# Altium PCB hd-hdr.PcbDoc
Units mil, origin at the board's own origin, x right, y up, seen from the top; angles counter-clockwise.
Board outline 1400 x 650 mil, 6 copper layers (Top, 2-GND, 3-SIG, 4-SIG, 5-GND, Bottom), stack 46.142 mil thick; 63 components, 39 nets, 251 pads, 143 vias.
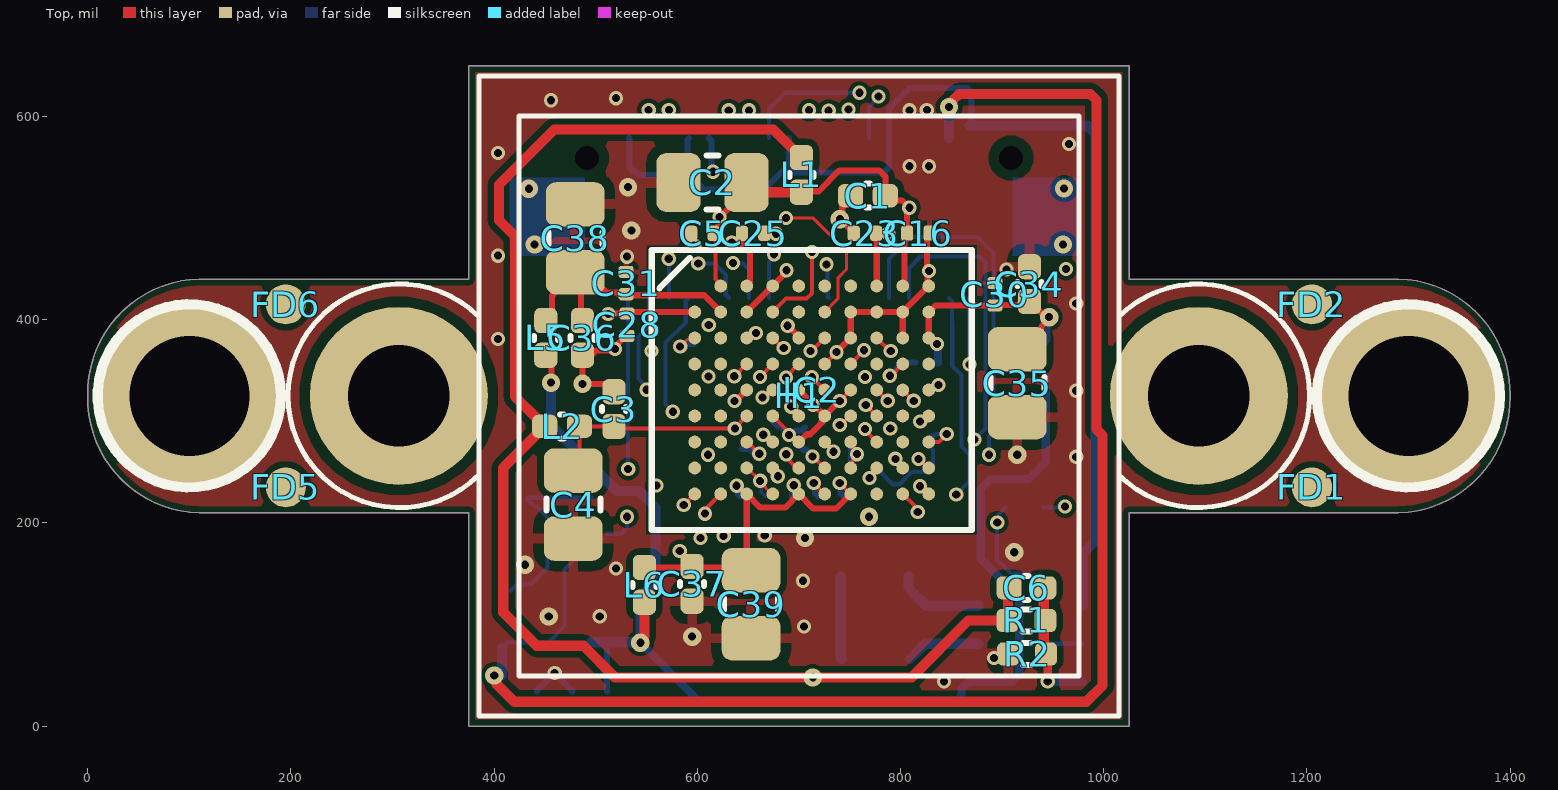
[diagram p0: Top view]
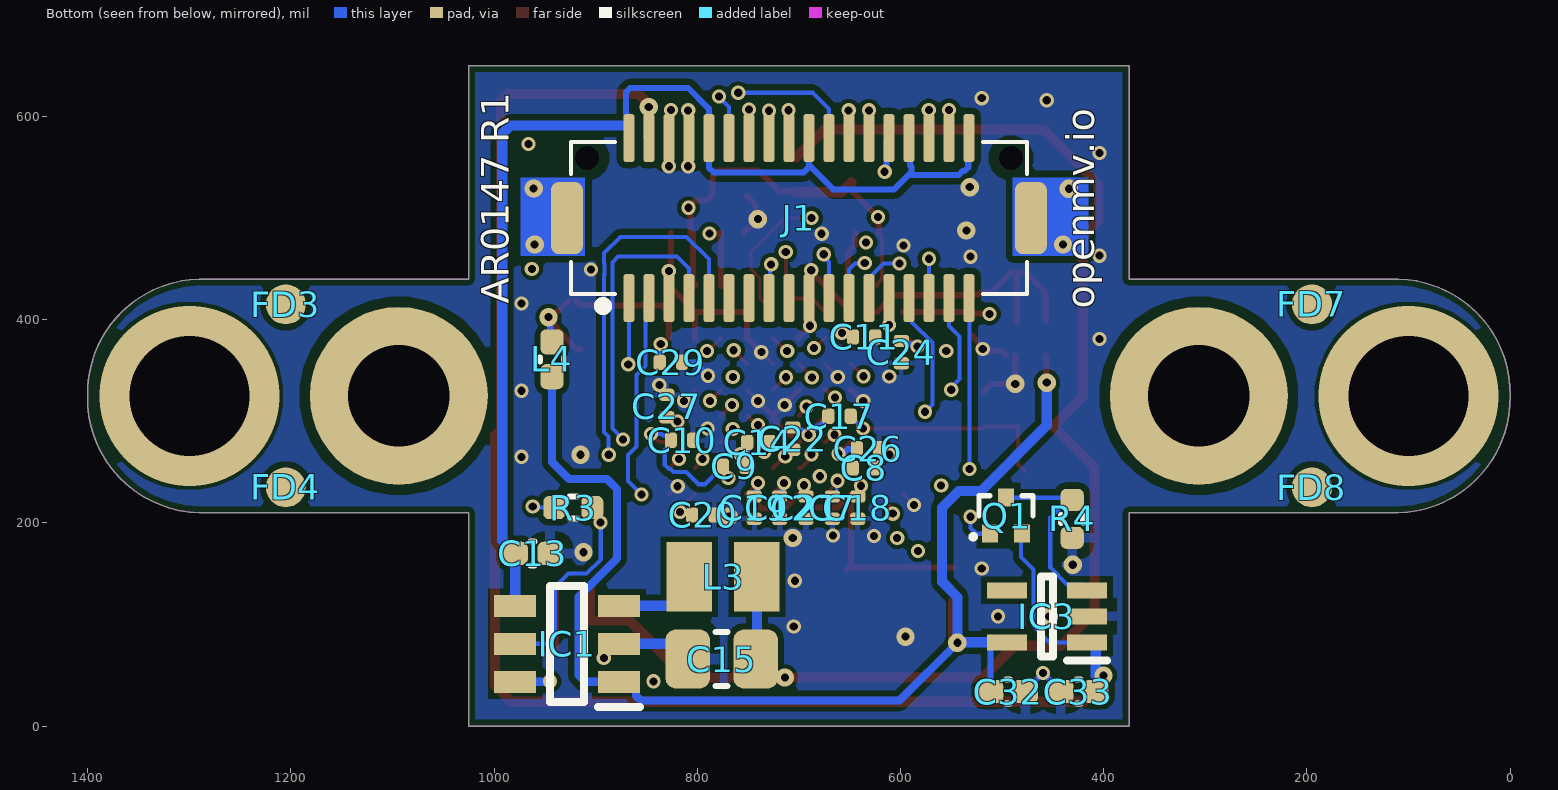
[diagram p1: Bottom view, seen from below]
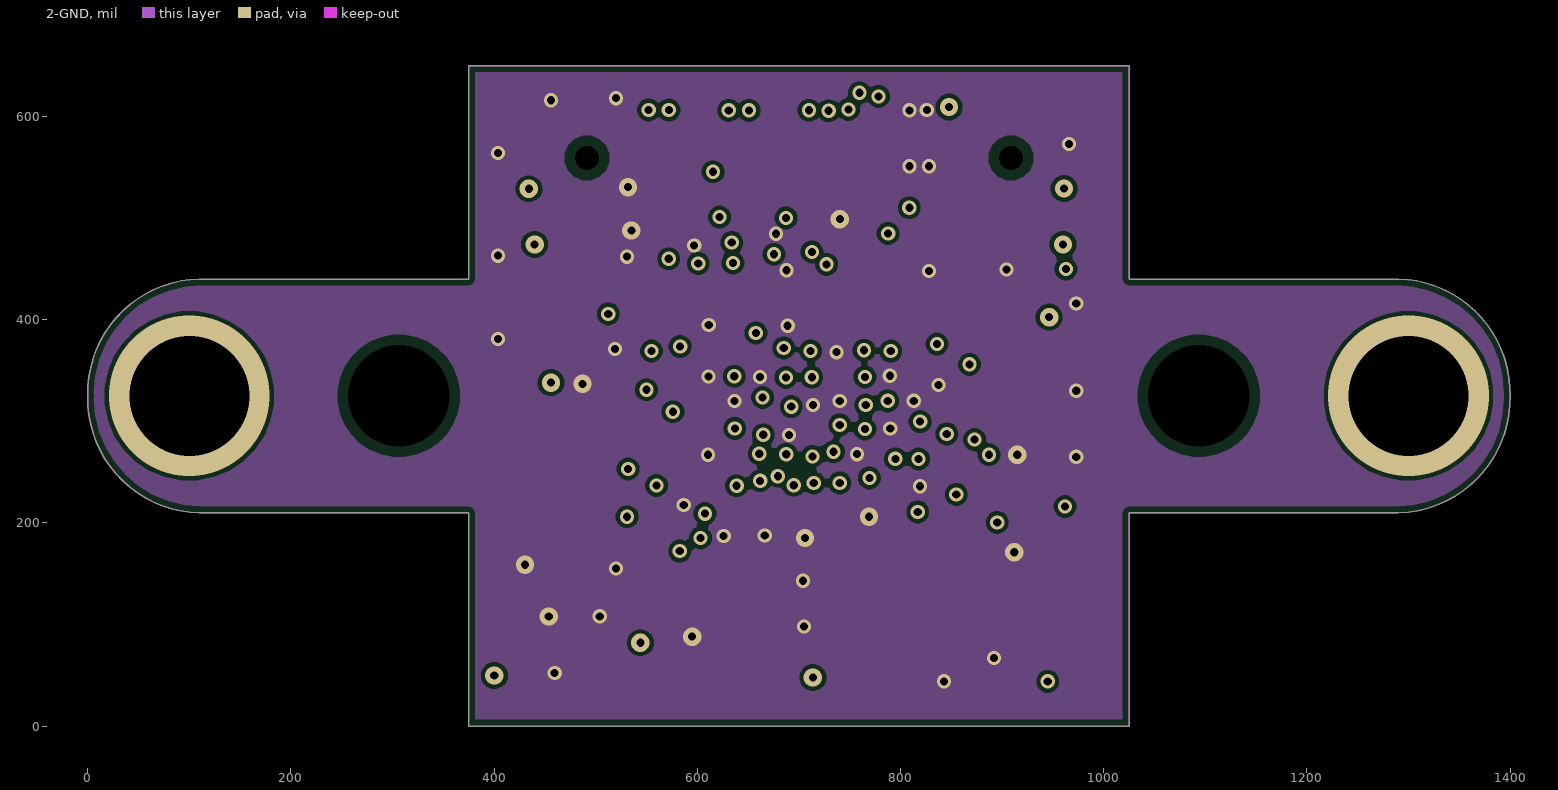
[diagram p2: 2-GND]
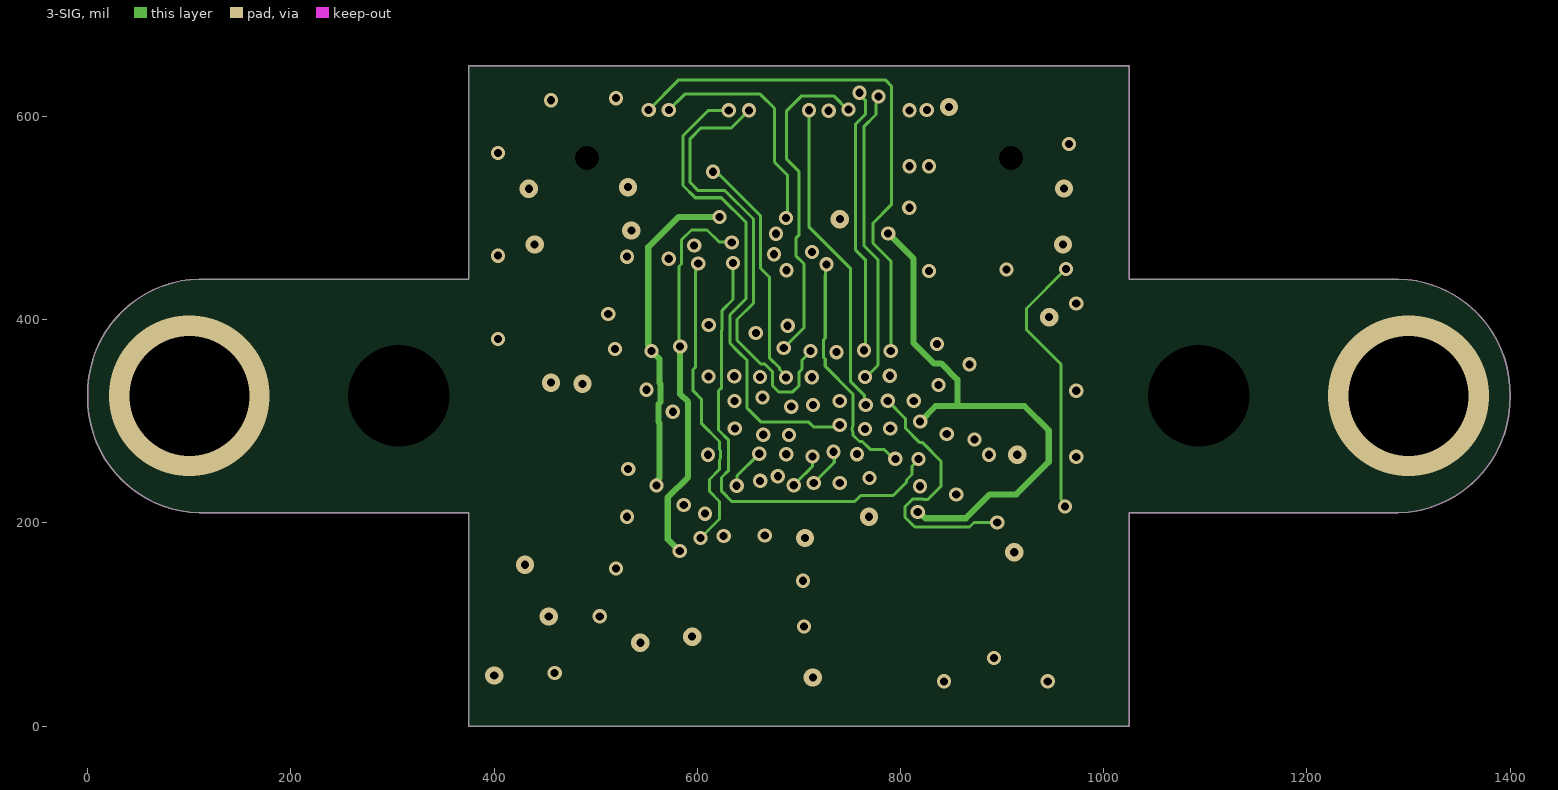
[diagram p3: 3-SIG]
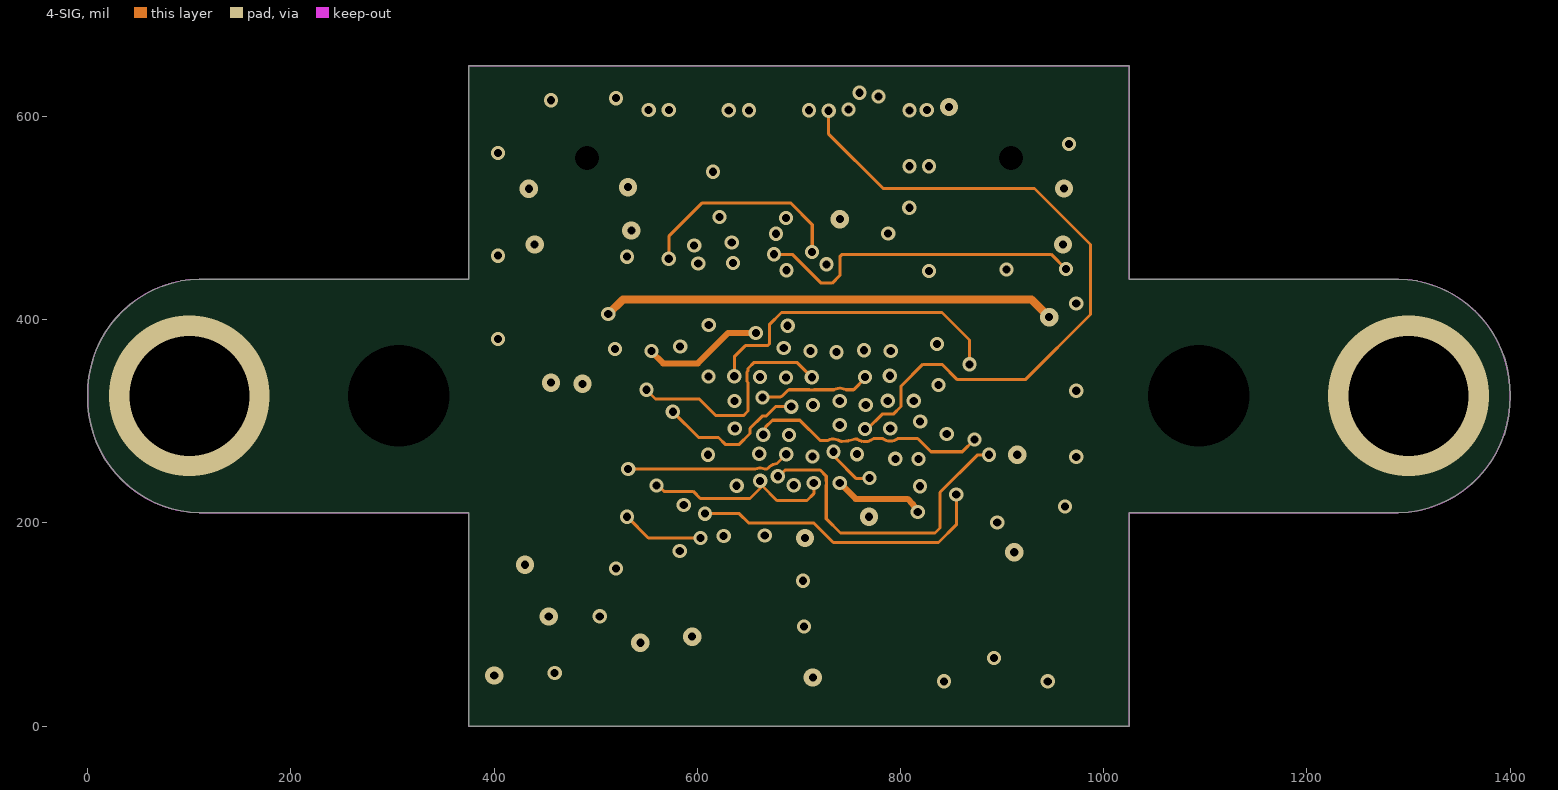
[diagram p4: 4-SIG]
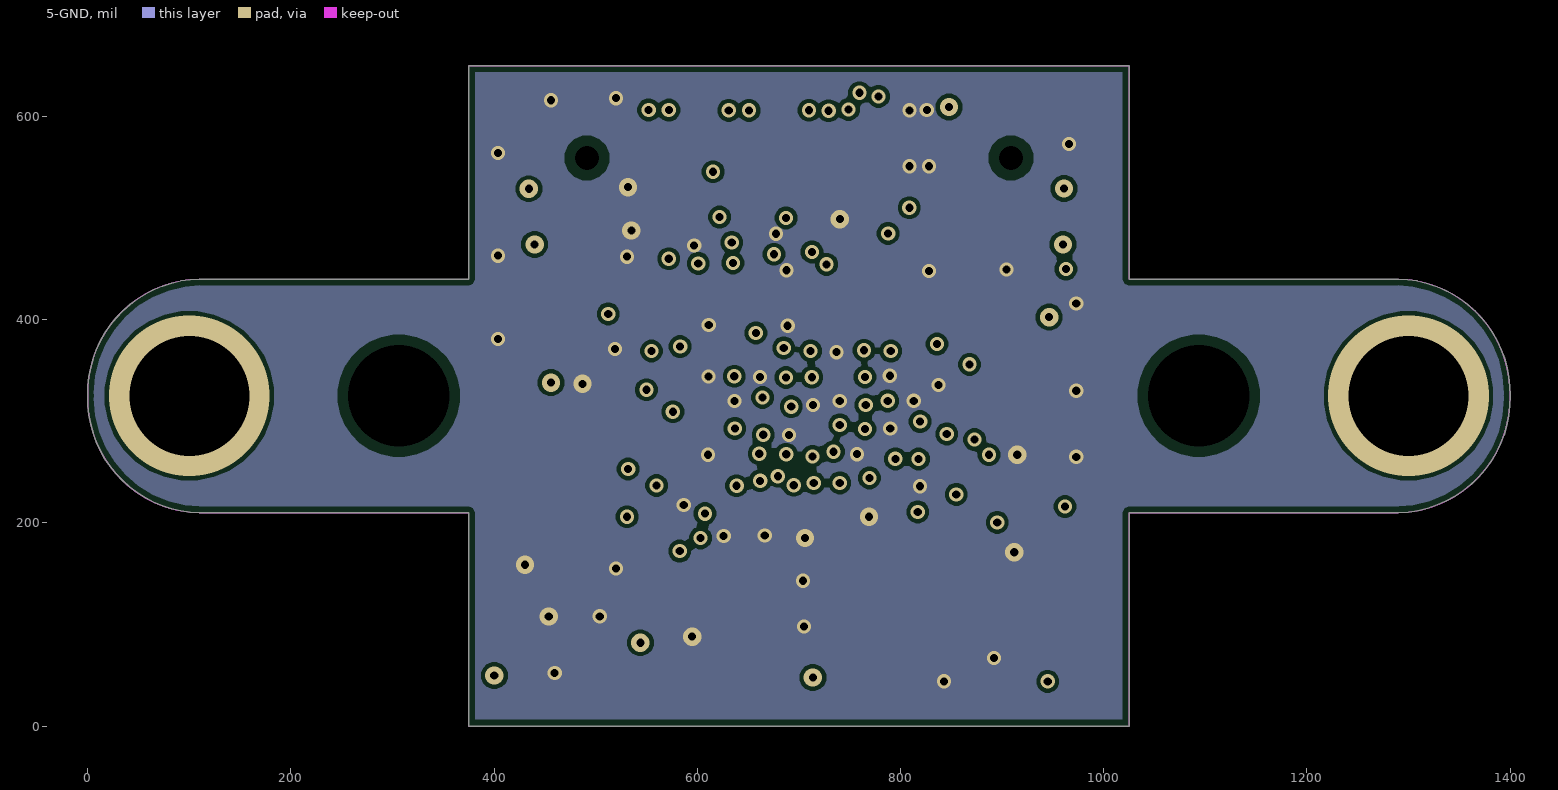
[diagram p5: 5-GND]
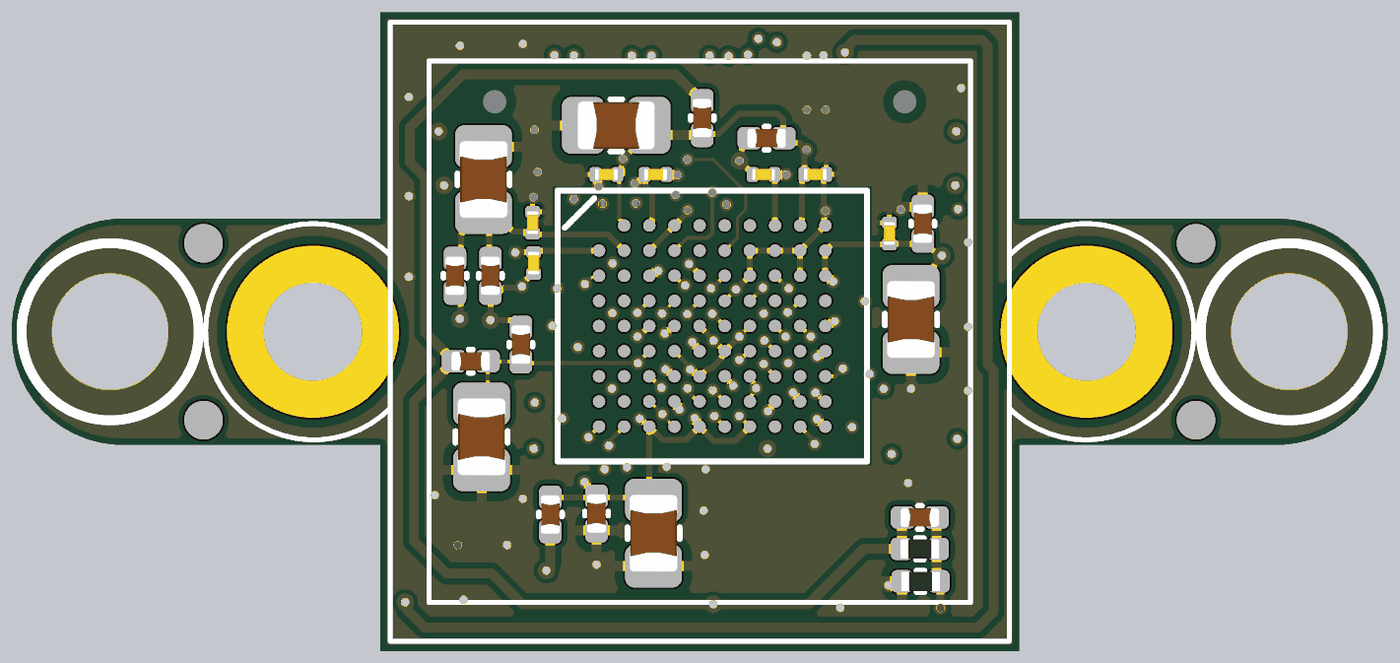
[diagram p6: 3D render of the assembled board from above, using the file's embedded part models]
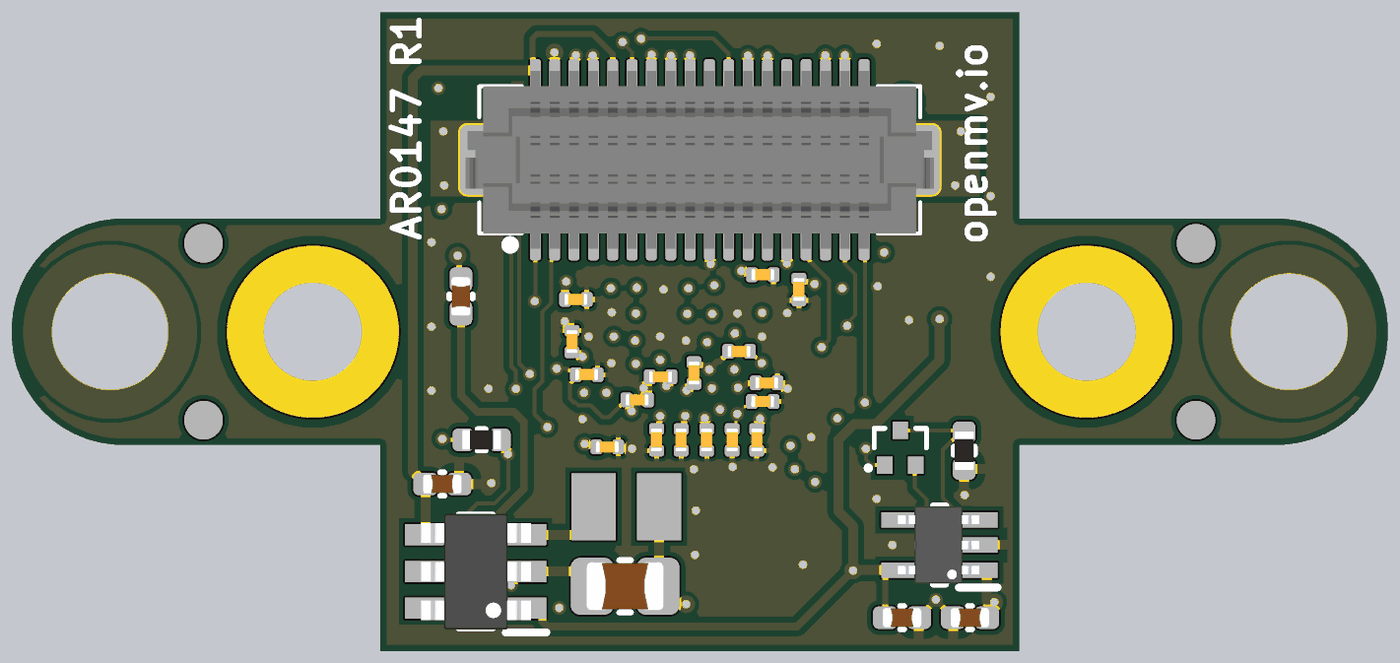
[diagram p7: 3D render of the assembled board from below, using the file's embedded part models]

## Layer stack, top to bottom
Top Solder: solder mask 0.4, Solder Resist, Dk 3.5
Top: signal copper 1.378
Dielectric 2: prepreg 5, PP-006, Dk 4.1
2-GND: signal copper 1.378
Dielectric 3: prepreg 10, PP-006, Dk 4.1
3-SIG: signal copper 1.378
Dielectric 1: dielectric 7.874, FR-4, Dk 4.8
4-SIG: signal copper 1.378
Dielectric 4: prepreg 10, PP-006, Dk 4.1
5-GND: signal copper 1.378
Dielectric 5: prepreg 5, PP-006, Dk 4.1
Bottom: signal copper 1.378
Bottom Solder: solder mask 0.4, Solder Resist, Dk 3.5

## Board outline
1290.03,210 1025.03,210 1025.03,0 375.03,0 375.03,210 110.03,210 cw(c112.53,322.5) 0.03,325 cw(c112.53,327.5) 110.03,440 375.03,440 375.03,650 1025.03,650 1025.03,440 1290.03,440 cw(c1287.53,327.5) 1400.03,325 cw(c1287.53,322.5)

## Design rules (kind name [scope] priority, off if disabled: settings)
BoardOutlineClearance mdCopperDimension [All] p1: gap=10 ignorepadtopadclearanceinfootprint=FALSE except(0: Arc-SplitContinuation Track-SplitContinuation SMDPad-SplitContinuation THPad-SplitContinuation Via-SplitContinuation Fill-SplitContinuation Poly-SplitContinuation Region-SplitContinuation Text-SplitContinuation; 3: Poly-OutlineEdge Poly-CavityEdge Poly-CutoutEdge Poly-SplitBarrior)
Clearance [All] p1: gap=4 ignorepadtopadclearanceinfootprint=FALSE except(6: Arc-Fill Arc-Poly Arc-Region Track-Fill Track-Poly Track-Region SMDPad-Fill SMDPad-Poly SMDPad-Region Fill-Fill Fill-Poly Fill-Region Poly-Poly Poly-Region Region-Region; 10: THPad-Fill THPad-Poly THPad-Region)
ComponentClearance ComponentClearance_1 [InComponent('H1')] p1: gap=0 collisioncheckmode=3 verticalgap=0 showdistances=FALSE
ComponentClearance [All] p2: gap=6 collisioncheckmode=3 verticalgap=10 showdistances=FALSE
HoleSize HoleSize_For_NetClass_signal [InNetClass('signal')] p1: absolutevalues=TRUE maxlimit=4 minlimit=4 maxpercent=80.000 minpercent=20.000
HoleSize HoleSize_For_NetClass_pwr [InNetClass('pwr')] p2: absolutevalues=TRUE maxlimit=4 minlimit=4 maxpercent=80.000 minpercent=20.000
HoleSize HoleSize_For_NetClass_gnd [InNetClass('gnd')] p3: absolutevalues=TRUE maxlimit=4 minlimit=4 maxpercent=80.000 minpercent=20.000
HoleSize [All] p4: absolutevalues=TRUE maxlimit=100000 minlimit=4 maxpercent=80.000 minpercent=20.000
HoleToHoleClearance mdDrill [All] p1: gap=3 allowstackedmicrovias=TRUE
MinimumSolderMaskSliver [All] p1 off: minsoldermaskwidth=10
PasteMaskExpansion Expansion_SMDPaste_OFF [InPadClass('SMDPaste_OFF')] p1: expansion=0
PasteMaskExpansion mlMinCreamFrame [All] p2: expansion=0
PolygonConnect PolygonConnect_1 [HasFootprint('C0201')] p1: thpad.connectstyle=Relief thpad.reliefconductorwidth=10 thpad.reliefentries=4 thpad.polygonreliefangle="90 Angle" thpad.airgapwidth=10 smdpad.connectstyle=Relief smdpad.reliefconductorwidth=5 smdpad.reliefentries=4 smdpad.polygonreliefangle="90 Angle" smdpad.airgapwidth=5 via.connectstyle=Relief via.reliefconductorwidth=10 via.reliefentries=4 via.polygonreliefangle="90 Angle" via.airgapwidth=10
PolygonConnect [All] p2: thpad.connectstyle=Relief thpad.reliefconductorwidth=10 thpad.reliefentries=4 thpad.polygonreliefangle="90 Angle" thpad.airgapwidth=10 smdpad.connectstyle=Relief smdpad.reliefconductorwidth=10 smdpad.reliefentries=4 smdpad.polygonreliefangle="90 Angle" smdpad.airgapwidth=10 via.connectstyle=Direct via.reliefconductorwidth=10 via.reliefentries=4 via.polygonreliefangle="90 Angle" via.airgapwidth=10
RoutingVias [All] p1: holewidth=8 width=14 viastyle="Through Hole" minholewidth=8 minwidth=14 maxholewidth=100 maxwidth=100
SolderMaskExpansion mlMinStopFrame [All] p1: expansion=2 istentingtop=FALSE
Width [All] p1: maxlimit=10 minlimit=3 preferedwidth=3
25 further rules are at their usual default settings.

## Classes and differential pairs
pad class SMDPaste_OFF: FD1-1 FD2-1 FD3-1 FD4-1 FD5-1 FD6-1 FD7-1 FD8-1 J1-1 J1-2 J1-3 J1-4 J1-5 J1-6 J1-7 J1-8 J1-9 J1-10 J1-11 J1-12 J1-13 J1-14 J1-15 J1-16 J1-17 J1-18 J1-19 J1-20 J1-21 J1-22 J1-23 J1-24 J1-25 J1-26 J1-27 J1-28 J1-29 J1-30 J1-31 J1-32 J1-33 J1-34 J1-35 J1-36

## Components (designator, comment, footprint, x,y, rotation, side; value= is the part's Value field where it differs from the comment)
C1 "4.7uF" 0402 768,522 r0 top
C2 "22uF" 0805 615.03,535 r0 top
C3 "4.7uF" 0402 518,312 r270 top
C4 "22uF" 0805 478,218 r90 top
C5 "0.22uF" C0201 605.03,485 r180 top
C6 "6.8pF" 0402 924,136 r0 top
C7 "0.22uF" C0201 667,215 r270 bottom
C8 "0.22uF" C0201 636,254 r180 bottom
C9 "0.22uF" C0201 763.69,255.73 r180 bottom
C10 "0.22uF" C0201 815.02,281.37 r180 bottom
C11 "0.22uF" C0201 635.85,383.03 r180 bottom
C12 "0.22uF" C0201 719,215 r270 bottom
C13 "4.7uF" 0402 962,170 r0 bottom
C14 "0.22uF" C0201 739.89,279.11 r0 bottom
C15 "22uF" 0805 776,66 r180 bottom
C16 "0.22uF" C0201 817.58,485.18 r0 top
C17 "0.22uF" C0201 660.03,305 r0 bottom
C18 "0.22uF" C0201 642,215 r270 bottom
C19 "0.22uF" C0201 744,215 r270 bottom
C20 "0.22uF" C0201 794.16,207.79 r180 bottom
C21 "0.22uF" C0201 693,215 r270 bottom
C22 "0.22uF" C0201 706,283 r90 bottom
C23 "0.22uF" C0201 765.03,485 r180 top
C24 "0.22uF" C0201 599.14,368.04 r270 bottom
C25 "0.22uF" C0201 655.03,485 r0 top
C26 "0.22uF" C0201 631.94,273.03 r180 bottom
C27 "0.22uF" C0201 830.03,315 r90 bottom
C28 "0.22uF" C0201 531,395 r270 top
C29 "0.22uF" C0201 826,358 r180 bottom
C30 "0.22uF" C0201 893,425 r90 top
C31 "0.22uF" C0201 530,436 r90 top
C32 "4.7uF" 0402 494.13,34 r0 bottom
C33 "4.7uF" 0402 425,34 r180 bottom
C34 "4.7uF" 0402 927,435 r270 top
C35 "22uF" 0805 915.03,337.5 r90 top
C36 "4.7uF" 0402 487,382 r90 top
C37 "4.7uF" 0402 595,140 r90 top
C38 "22uF" 0805 480,480 r270 top
C39 "22uF" 0805 653,120 r90 top
FD1 "FIDUCIAL1X2" FIDUCIAL-1X2 1205.03,235 r0 top
FD2 "FIDUCIAL1X2" FIDUCIAL-1X2 1205.03,415 r0 top
FD3 "FIDUCIAL1X2" FIDUCIAL-1X2 1205.03,415 r180 bottom
FD4 "FIDUCIAL1X2" FIDUCIAL-1X2 1205.03,235 r180 bottom
FD5 "FIDUCIAL1X2" FIDUCIAL-1X2 195.03,235 r0 top
FD6 "FIDUCIAL1X2" FIDUCIAL-1X2 195.03,415 r0 top
FD7 "FIDUCIAL1X2" FIDUCIAL-1X2 195.03,415 r180 bottom
FD8 "FIDUCIAL1X2" FIDUCIAL-1X2 195.03,235 r180 bottom
H1 "LENSMOUNT20MM" LENSMOUNT-20MM 700.03,325 r0 top locked
IC1 "TLV62568PDDCR" SOT95P280X110-6N 928,81 r0 bottom
IC2 "AR0147ATSC00XUEG5" AR0147ATSC00XUEG5 712.68,330.82 r0 top locked
IC3 "MIC5365-2.8YC5-TR" SOT65P210X110-5N 456.03,108 r0 bottom
J1 "DF12-36-DP" DF12-36-DP 700.03,500 r0 bottom locked
L1 "100" 0402 702.53,542.5 r90 top
L2 "100" 0402 467,295 r180 top
L3 "MAKK2016T2R2M" INDC2016X100N 774.65,147 r0 bottom
L4 "100" 0402 943,361 r270 bottom
L5 "100" 0402 451,382 r270 top
L6 "100" 0402 548,139 r270 top
Q1 "SSM3J15FV,L3F" SSM3J15FV 496,207 r180 bottom
R1 "100K" R0402 924,104 r180 top
R2 "100K" R0402 924.7,71 r180 top
R3 "10K" R0402 922,215 r0 bottom
R4 "100K" R0402 431,204 r270 bottom

## Footprints (in the part's own frame and the unit in brackets; to place one, negate y for a bottom-side part, rotate by r counter-clockwise, add the part's x,y. Pads: shape width x height; smd on the part's side, far side on the other; paste and mask are expansions set on the pad)
0402 [mm] "Chip Capacitor, 2-Leads, Body  0402 (in) 1005 (mm), IPC Medium Density"
  rrect52% 0.63x0.58 smd mask+0.05: 1(-0.435,0) 2(0.435,0)
  silkscreen extent -0.05,-0.3 0.05,0.3, body extent -0.5,-0.25 0.5,0.25, height 0.5
0805 [mm] "Chip Capacitor, Body 0805 imperial, 2.0x1.2mm, IPC Medium Density"
  rrect45% 1.11x1.47 smd: 1(-0.85,0) 2(0.85,0)
  silkscreen extent -0.15,-0.67 0.15,0.67, body extent -1,-0.62 1,0.63, height 1.25
AR0147ATSC00XUEG5 [mm] "AR0147ATSC00XUEG5"
  rrect100% 0.32x0.32 smd: P$1(-2.275,2.6) P$2(-1.625,2.6) P$3(-0.975,2.6) P$4(-0.325,2.6) P$5(0.325,2.6) P$6(0.975,2.6) P$7(1.625,2.6) P$8(2.275,2.6) P$9(2.925,2.6) P$10(-2.925,1.95) P$11(-2.275,1.95) P$12(-1.625,1.95) P$13(-0.975,1.95) P$14(-0.325,1.95) P$15(0.325,1.95) P$16(0.975,1.95) P$17(1.625,1.95) P$18(2.275,1.95) P$19(2.925,1.95) P$20(-2.925,1.3) P$21(-2.275,1.3) P$22(-1.625,1.3) P$23(-0.975,1.3) P$24(-0.325,1.3) P$25(0.325,1.3) P$26(0.975,1.3) P$27(1.625,1.3) P$28(2.275,1.3) P$29(2.925,1.3) P$30(-2.925,0.65) P$31(-2.275,0.65) P$32(-1.625,0.65) P$33(-0.975,0.65) P$34(-0.325,0.65) P$35(0.325,0.65) P$36(0.975,0.65) P$37(1.625,0.65) P$38(2.275,0.65) P$39(2.925,0.65) P$40(-2.925,0) P$41(-2.275,0) P$42(-1.625,0) P$43(-0.975,0) P$44(-0.325,0) P$45(0.325,0) P$46(0.975,0) P$47(1.625,0) P$48(2.275,0) P$49(2.925,0) P$50(-2.925,-0.65) P$51(-2.275,-0.65) P$52(-1.625,-0.65) P$53(-0.975,-0.65) P$54(-0.325,-0.65) P$55(0.325,-0.65) P$56(0.975,-0.65) P$57(1.625,-0.65) P$58(2.275,-0.65) P$59(2.925,-0.65) P$60(-2.925,-1.3) P$61(-2.275,-1.3) P$62(-1.625,-1.3) P$63(-0.975,-1.3) P$64(-0.325,-1.3) P$65(0.325,-1.3) P$66(0.975,-1.3) P$67(1.625,-1.3) P$68(2.275,-1.3) P$69(2.925,-1.3) P$70(-2.925,-1.95) P$71(-2.275,-1.95) P$72(-1.625,-1.95) P$73(-0.975,-1.95) P$74(-0.325,-1.95) P$75(0.325,-1.95) P$76(0.975,-1.95) P$77(1.625,-1.95) P$78(2.275,-1.95) P$79(2.925,-1.95) P$80(-2.925,-2.6) P$81(-2.275,-2.6) P$82(-1.625,-2.6) P$83(-0.975,-2.6) P$84(-0.325,-2.6) P$85(0.325,-2.6) P$86(0.975,-2.6) P$87(1.625,-2.6) P$88(2.275,-2.6) P$89(2.925,-2.6)
  silkscreen extent -4,-3.5 4,3.5, body extent -4,-3.5 4,3.5, height 1
C0201 [mil] "0201 IPC-7351"
  rrect50% 12x15 smd mask+1.97: 1(-11,0) 2(11,0)
  body extent -12,-6 12,6, height 14
DF12-36-DP [mm] "36 Position Connector Receptacle, Center Strip Contacts Surface Mount Gold"
  rrect50% 0.8x1.8 smd mask+0.05: 0(-5.8,0) 0(5.8,0)
  rrect50% 0.28x1.2 smd mask+0.05: 1(4.25,2) 2(4.25,-2) 3(3.75,2) 4(3.75,-2) 5(3.25,2) 6(3.25,-2) 7(2.75,2) 8(2.75,-2) 9(2.25,2) 10(2.25,-2) 11(1.75,2) 12(1.75,-2) 13(1.25,2) 14(1.25,-2) 15(0.75,2) 16(0.75,-2) 17(0.25,2) 18(0.25,-2) 19(-0.25,2) 20(-0.25,-2) 21(-0.75,2) 22(-0.75,-2) 23(-1.25,2) 24(-1.25,-2) 25(-1.75,2) 26(-1.75,-2) 27(-2.25,2) 28(-2.25,-2) 29(-2.75,2) 30(-2.75,-2) 31(-3.25,2) 32(-3.25,-2) 33(-3.75,2) 34(-3.75,-2) 35(-4.25,2) 36(-4.25,-2)
  round 0 hole 0.6 unplated: MH1(-5.3,-1.5) MH2(5.3,-1.5)
  silkscreen extent -5.7,-1.9 5.7,2.3, body extent -6.05,-2.3 6.05,2.3, height 2.3
FIDUCIAL-1X2 [mm] "FIDUCIAL-1X2"
  rrect100% 1x1 smd paste+0: 1(0,0)
INDC2016X100N [mm] "INDC2016X100N"
  rect 1.14x1.73 smd: 1(-0.847,0) 2(0.847,0)
  body extent -1,-0.8 1,0.8, height 1
LENSMOUNT-20MM [mil] "LENSMOUNT-20MM"
  round 175 / inner round 0 / far side round 175 hole 100: P$1(-393.7,0) P$2(393.7,0)
  silkscreen extent -503,-315 503,315
R0402 [mm] "Chip Resistor, 2-Leads, Body  0402 (in) 1005 (mm), IPC Medium Density"
  rrect51% 0.55x0.58 smd mask+0.05: 1(-0.475,0) 2(0.475,0)
  silkscreen extent -0.1,-0.28 0.1,0.28, body extent -0.5,-0.25 0.5,0.25, height 0.34
SOT65P210X110-5N [mm] "SOT65P210X110-5N"
  rect 1x0.4 smd: 1(-1,0.65) 2(-1,0) 3(-1,-0.65) 4(1,-0.65) 5(1,0.65)
  silkscreen extent -1.5,-1 0.15,1.1, body extent -1.02,-1 1.07,1, height 0.96
SOT95P280X110-6N [mil] "SOT95P280X100-6N"
  rect 41.34x21.65 smd: 1(-51.18,37.4) 2(-51.18,0) 3(-51.18,-37.4) 4(51.18,-37.4) 5(51.18,0) 6(51.18,37.4)
  silkscreen extent -72,-57 17,62, body extent -56,-59 56,59, height 44
SSM3J15FV [mm]
  rect 0.4x0.45 smd: 1(-0.4,-0.45) 2(0.4,-0.45) 3(0,0.45)
  silkscreen extent -0.88,-0.58 0.67,0.5, body extent -0.6,-0.6 0.6,0.6, height 0.6

## Part data
C1 C3 C13 C32 C33 C34 C36 C37: library part CAP_0402, "0402 (1005 Metric) Nick Garner - TeleSense", MPN=JMK105BBJ475MV-F, DeviceSetName=CAP_0402, GateName_1=G$1, LibraryName=0402, SymbolName_1=CAP
C2 C4 C15 C35 C38 C39: library part 22UF-0805-6.3V-20%, "22ÂµF ceramic capacitors    A capacitor is a passive two-terminal electrical component used to store electrical energy temporarily in an electric field.", MPN=CL21A226MQQNNNE, DeviceName=-0805-6.3V-20%, DeviceSetName=22UF, GateName_1=G$1, LibraryName=SparkFun-Capacitors, PROD_ID=CAP-08402, SymbolName_1=CAP
C5 C7 C8 C9 C10 C11 C12 C14 C16 C17 C18 C19 C20 C21 C22 C23 C24 C25 C26 C27 C28 C29 C30 C31: library part C-EUC0201, "CAPACITOR, European symbol", MPN=GRM033R60J224ME15D, DeviceName=C0201, DeviceSetName=C-EU, GateName_1=G$1, LibraryName=rcl, POPULARITY=0, SPICEPREFIX=C, SymbolName_1=C-EU
C6: library part CAP_0402, "0402 (1005 Metric) Nick Garner - TeleSense", MPN=GRM1555C1H6R8DA01D, DeviceSetName=CAP_0402, GateName_1=G$1, LibraryName=0402, SymbolName_1=CAP
FD1 FD2 FD3 FD4 FD5 FD6 FD7 FD8: "Fiducial Alignment Points    Point-of-reference for pick-and-place machines and other optical instruments.", DeviceName=1X2, DeviceSetName=FIDUCIAL, GateName_1=G$1, LibraryName=SparkFun-Aesthetics, SymbolName_1=FIDUCIAL
IC1: "2.5V-5.5V input, 1A high efficiency step-down buck converter in SOT23 and SOT563 package   Source:  Datasheet", MANUFACTURER_NAME="Texas Instruments", DeviceSetName=TLV62568PDDCR, GateName_1=G$1, HEIGHT=1.1mm, LibraryName=TLV62568PDDCR, MANUFACTURER_PART_NUMBER=TLV62568PDDCR, MOUSER_PART_NUMBER=595-TLV62568PDDCR, MOUSER_PRICE-STOCK=https://www.mouser.co.uk/ProductDetail/Texas-Instruments/TLV62568PDDCR?qs=1mbolxNpo8f1FPchIXcxyQ%3D%3D, MPN=TLV62568PDDCR, SymbolName_1=TLV62568PDDCR
IC2: MPN=AR0147ATSC00XUEG5-DRBR, DeviceSetName=AR0147ATSC00XUEG5, GateName_1=G$1, LibraryName=AR0147ATSC00XUEG5, SymbolName_1=AR0147ATSC00XUEG5
IC3: "IC REG LINEAR 2.8V 150MA SC70-5   Source:  Datasheet", MANUFACTURER_NAME=Microchip, DeviceSetName=MIC5365-2.8YC5-TR, GateName_1=G$1, HEIGHT=1.1mm, LibraryName=MIC5365-2.8YC5-TR, MANUFACTURER_PART_NUMBER=MIC5365-2.8YC5-TR, MOUSER_PART_NUMBER=998-MIC5365-2.8YC5TR, MOUSER_PRICE-STOCK=https://www.mouser.co.uk/ProductDetail/Microchip-Technology-Atmel/MIC5365-2.8YC5-TR?qs=U6T8BxXiZAX3mJDSWJyjVA%3D%3D, MPN=MIC5365-2.8YC5-TR, SymbolName_1=MIC5365-2.8YC5-TR
J1: MPN=DF12NB(3.0)-36DP-0.5V(51), DeviceSetName=DF12-36-DP, GateName_1=G$1, LibraryName=DF12NB(3.0)-36DP-0.5V(51), SymbolName_1=DF12-36
L1 L2 L4 L5 L6: library part INDUCTOR_0402, MPN=MFBM1V1005-101-R, DeviceSetName=INDUCTOR_0402, GateName_1=G$1, LibraryName=0402, SymbolName_1=INDUCTOR
L3: "INDUCTOR, METAL CORE Check availability", PACKAGE="2016 Taiyo Yuden", AVAILABILITY="In Stock", DeviceSetName=MAKK2016T2R2M, GateName_1=G$1, LibraryName=MAKK2016T2R2M, MF="Taiyo Yuden", MP=MAKK2016T2R2M, MPN=MAKK2016T2R2M, PRICE=None, PURCHASE-URL=https://pricing.snapeda.com/search/part/MAKK2016T2R2M/?ref=eda, SymbolName_1=MAKK2016T2R2M
Q1: library part PMXB120EPEZ, "MOSFET 30 V, P-channel Trench MOSFET   Source:  Datasheet", DeviceSetName=SSM3J15FV,L3F, GateName_1=G$1, HEIGHT=0.4mm, LibraryName=SSM3J15FV,L3F, MANUFACTURER_PART_NUMBER=SSM3J15FV,L3F, MPN=SSM3J15FV,L3F, SymbolName_1=SSM3J15FV,L3F
R1 R2 R4: library part R-US_R0402, "RESISTOR, American symbol", MPN=AC0402FR-07100KL, DeviceName=R0402, DeviceSetName=R-US_, GateName_1=G$1, LibraryName=rcl, POPULARITY=34, SPICEPREFIX=R, SymbolName_1=R-US
R3: library part R-US_R0402, "RESISTOR, American symbol", MPN=AC0402FR-1310KL, DeviceName=R0402, DeviceSetName=R-US_, GateName_1=G$1, LibraryName=rcl, POPULARITY=34, SPICEPREFIX=R, SymbolName_1=R-US
H1: DeviceName=20MM, DeviceSetName=LENSMOUNT, GateName_1=G$1, LibraryName=lensmount, SymbolName_1=LENS

## Via types
v1: diameter 14, hole 8, Top to Bottom, tented both sides, 120 vias
v2: diameter 18, hole 8, Top to Bottom, tented both sides, 21 vias
v3: diameter 177.17/158.11/158.11/158.11/158.11/177.17 (per signal layer), hole 118.11, Top to Bottom, 2 vias

## Nets (pads, with @x,y where several pads share a name; then routed paths per layer and width w, separated by ;. In a path a pad name is that pad's centre, name@x,y a point inside that pad or via, vN(x,y) a via of type N, cw(c..) or ccw(c..) an arc to the next point about the centre after c; other vN are vias at no path point)
DCMI_CLK: IC2.P$43 J1.12 | length 463.3
  Top w4: v1(664.38,323.36) 665.6,323.36 673.24,331 IC2.P$43@675.17,331
  3-SIG w3: v1(765.01,343.62) 766.45,343.62 778.02,355.19 778.02,368.46 cw(c790.5,369.12) 778.02,369.79 778.02,458.98 764,473 764,590 776,602 776,612.45 776.4,612.85 776.4,617.61 v1(778.5,619.71)
  4-SIG w3: v1(664.38,323.36) 665.02,324 681.56,324 cw(c687.27,312.88) 683.67,324.85 689.64,330.82 ccw(c687.26,343.09) 690.43,331 710.31,331 ; 710.34,331 cw(c710.31,328) 710.82,330.96 ccw(c712.78,343.3) 714.8,330.97 cw(c715.26,328) 715.26,331 733.65,331 734.37,331 cw(c740.34,320.02) 746.31,331 747.02,331 754,331 765.01,342.01 v1(765.01,343.62)
  Bottom w4: J1.12 768.93,609.31 778.5,618.88 v1(778.5,619.71)
DCMI_D0: IC2.P$81 J1.3 | length 522.7
  Top w4: v1@609.52,214.87 IC2.P$81
  4-SIG w3: v1(607.6,209.07) 641.46,209.07 650.53,200 714.49,200 733.91,180.58 837.52,180.58 855,198.06 v1(855,228)
  Bottom w4: J1.3 850.71,418.21 850.71,397.58 851,397.29 851,354.62 860,345.62 860,326 859.98,275.02 868,267 868,241 v1(855,228)
DCMI_D1: IC2.P$32 J1.1 | length 397.8
  Top w4: v1(636.5,344.25) IC2.P$32
  4-SIG w3: v1(636.5,344.25) 636.5,363.5 647.36,374.36 669.24,374.36 671,376.11 671,395 683,407 841,407 868,380 v1(868,356)
  Bottom w4: J1.1 867.35,356.65 v1(868,356)
DCMI_D2: IC2.P$73 J1.9 | length 670.8
  4-SIG w3: v1(679.35,245.9) 680.51,245.9 686.61,252 721,252 727,246 727,241.73 cw(c714.75,239.26) 727,236.8 727,204 741,190 834.12,190 839,194.88 839,230 875.98,266.98 v1(887.19,266.98)
  Bottom w4: J1.9 788.61,459.61 810.43,481.43 875.79,481.43 891.73,465.49 891.73,455.05 891.52,454.84 891.52,444.07 891.73,443.85 891.73,289.45 887.19,284.91 v1(887.19,266.98)
DCMI_D3: IC2.P$63 J1.7 | length 541.4
  Top w4: v1(664.99,286.68) 666.12,286.68 673.16,279.64 IC2.P$63
  4-SIG w3: v1(664.99,286.68) 667.09,288.78 667.09,293.98 674.11,301 701,301 720.83,281.17 728.4,281.17 cw(c734,270) 740.48,280.69 ccw(c742.01,283.27) 741.75,280.28 ccw(c742.7,292.75) 742.71,280.25 ccw(c742.7,317.35) 755.23,282.43 cw(c756.23,279.6) 757.93,282.07 ccw(c765,292.37) 773.28,283 782.5,283 ccw(c790,293) 797.5,283 817,283 830,270 860.97,270 v1(872.98,282.02)
  Bottom w4: J1.7 808.3,450.3 820,462 878,462 883.52,456.48 883.52,440.75 883.63,440.65 883.63,292.66 v1(872.98,282.02)
DCMI_D4: IC2.P$13 J1.31 | length 338.6
  Top w4: IC2.P$13 687.32,420.62 707.65,420.62 712.87,425.85 v1(712.87,466.65)
  4-SIG w3: v1(572,460) 572,482 605,515 691.79,515 713.23,493.56 713.23,467.01 v1(712.87,466.65)
  Bottom w4: v1(572,460) 572.08,459.93 J1.31
DCMI_D5: IC2.P$54 J1.29 | length 285
  Top w4: v1(692.49,314.37) 692.49,313.49 699.88,306.11 IC2.P$54
  4-SIG w3: v1(576,309.35) 601.35,284 621,284 628,277 641,277 652,288 652,293 664,305 667.69,305 677.06,314.37 v1(692.49,314.37)
  Bottom w4: v1(576,309.35) 568.68,316.69 568.68,377.37 588.71,397.41 588.71,418.21 J1.29
DCMI_D6: IC2.P$74 J1.35 | length 349.5
  Top w4: v1(687.58,267.47) 687.58,264.76 691.84,260.5 691.84,260.1 697.89,254.05 IC2.P$74
  4-SIG w3: v1(532,253) 657.32,253 cw(c661.93,241.38) 666.53,253 667.6,253 668.78,253 669.64,253.8 ccw(c667.6,256) 669.86,254.03 cw(c679.35,245.9) 678.49,258.37 v1(687.58,267.47)
  Bottom w4: v1(532,253) 532,420.56 J1.35
DCMI_D7: IC2.P$34 J1.28 | length 287.6
  Top w4: v1(687.26,343.09) 687.26,343.79 IC2.P$34
  3-SIG w3: v1(615.59,545.56) 618.56,545.56 621.97,542.15 622.44,542.15 662.3,502.3 662.3,450.6 671,441.9 671,362.57 681.16,352.41 681.16,350.85 687.26,344.75 v1(687.26,343.09)
  Bottom w6: J1.28 613.88,576.31 613.88,549.44 615.59,547.73 v1(615.59,545.56)
DCMI_D8: IC2.P$56 J1.26 | length 492
  Top w4: v1(740.32,296.34) 741.25,296.34 750.14,305.23 IC2.P$56
  3-SIG w3: v1(631,606) 611,606 586,581 586,532 598,520 623.75,520 648.21,495.54 648.21,420.85 632.16,404.8 632.16,376.86 640.52,368.5 649.16,359.86 649.16,312.84 661.97,300.03 662.85,299.15 664.09,299.15 664.18,299.15 cw(c664.99,286.68) 666.4,299.1 709.9,299.1 714.57,294.43 738.41,294.43 v1(740.32,296.34)
DCMI_D9: IC2.P$45 J1.33 | length 342.4
  Top w4: v1(712.78,343.3) 713,343.3 IC2.P$45
  4-SIG w3: v1(550,331) 559,322 602,322 618.5,305.5 645.5,305.5 650,310 650,338.07 649,339.07 649,348.65 650,349.65 650,352 656,358 698.09,358 v1(712.78,343.3)
  Bottom w4: v1(550,331) 550,333.71 542,341.71 542,383.44 552.39,393.83 J1.33
DCMI_D10: IC2.P$25 J1.24 | length 466.7
  Top w4: v1(711.52,369.2) 712.68,369.2 IC2.P$25
  3-SIG w3: v1(651,606) 633.55,588.55 603.45,588.55 593,578.1 593,534.9 600.9,527 627.29,527 655.3,498.99 655.3,416.22 639.16,400.08 639.16,379.76 662.71,356.21 666.76,356.21 674.16,348.81 674.16,338.45 674,338.29 674,335 680,329 694,329 700.28,335.28 700.28,348.48 703.09,351.29 703.09,360.09 711.52,368.52 v1(711.52,369.2)
DCMI_D11: IC2.P$36 J1.22 | length 407.5
  Top w4: IC2.P$36 764.21,369.55 v1(764.21,369.88)
  3-SIG w3: v1(759.7,623.32) 759.7,621.77 765.41,616.06 765.41,602 756,592.59 756,468.41 765.41,459 765.41,371.08 v1(764.21,369.88)
  Bottom w4: J1.22 670.5,607.5 686.32,623.32 v1(759.7,623.32)
DCMI_FSIN: IC2.P$79 J1.23 | length 519.5
  Top w4: v1(817.87,262.85) 818.45,262.85 827.25,254.05 IC2.P$79
  3-SIG w3: v1(635.14,455.82) 635.14,419.83 624.51,409.19 624.51,389.79 624,389.28 624,333 621,330 621,291.32 630.97,281.36 630.97,251.75 623.85,244.63 623.85,242.15 624,242 624,231 634,221 755,221 761,227 792.9,227 806,240.1 806,242.21 811.4,247.62 811.4,255.59 817.87,262.06 v1(817.87,262.85)
  Bottom w4: v1(635.14,455.82) 635.86,455.11 644.89,455.11 650.82,449.18 J1.23
DCMI_HSYNC: IC2.P$57 J1.18 | length 328.4
  Top w4: v1(765.86,315.96) IC2.P$57
  3-SIG w3: v1(710.14,606.16) 710.14,491.04 751,450.18 751,338.98 764.81,325.18 764.81,317.01 v1(765.86,315.96)
DCMI_PCLK: IC2.P$23 J1.14 | length 338.5
  Top w4: IC2.P$23 684.11,372.18 v1(685.15,372.18)
  3-SIG w3: v1(685.15,372.18) 705,392.03 705,455 697,463 697,480 700,483 700,546 688,558 688,605.58 702.34,619.93 734.76,619.93 747.8,606.88 v1(749.03,606.88)
DCMI_PWDN: J1.25 Q1.1 | length 469.6
  3-SIG w3: v1(601.04,455.33) 598.94,453.22 598.94,448.51 598.5,448.07 598.5,353.5 596,351 596,330 604,322 604,298 622,280 622,272.3 cw(c610.64,267.08) 622,261.87 622,252.68 612,242.68 612,231 622,221 622,203.88 v1(603.26,185.14)
  4-SIG w3: v1(531,206) 551.86,185.14 v1(603.26,185.14)
  Bottom w4: Q1.1@510.76,189.28 525.28,189.28 531,195 v1(531,206) ; v1(601.04,455.33) 601.23,455.14 616.91,455.14 628.09,443.96 628.09,424.31 J1.25
DCMI_PWDN_INT: IC3.3 Q1.3 R4.1 | length 186
  Bottom w4: IC3.3 422.53,139.47 436.15,139.47 452.57,155.88 452.57,205.17 441.69,216.05 440.15,216.05 433.02,223.18 433.02,224.72 Q1.3
DCMI_RST: J1.21 R3.2 | length 660.2
  3-SIG w3: v1(962,216) 962,218.98 958,222.98 958,356 924,390 924,410.99 v1(962.84,449.83)
  4-SIG w3: v1(675.57,464.33) 693.58,464.33 722,435.9 732.77,435.9 740.39,443.52 740.39,461.98 742.73,464.33 948.34,464.33 v1(962.84,449.83)
  Bottom w4: J1.21 670.5,456.98 675.57,462.05 v1(675.57,464.33) ; R3.2 961,215 v1(962,216)
DCMI_SCL: IC2.P$15 J1.32 | length 371.6
  Top w3: v1(687.5,500.17) 713.83,500.17 747,467 747,449.51 738.37,440.87 738.37,420.48 IC2.P$15
  3-SIG w3: v1(572.08,606.31) 587.77,622 662,622 676,608 676,555 689.03,541.97 689.03,501.7 v1(687.5,500.17)
DCMI_SDA: IC2.P$27 J1.34 | length 548.3
  Top w4: IC2.P$27 789.53,369.12 v1(790.5,369.12)
  3-SIG w3: v1(552.19,606.42) 581.78,636 785,636 791,630 791,513 773,495 773,475.29 790.5,457.79 v1(790.5,369.12)
DCMI_VSYNC: IC2.P$67 J1.16 | length 705
  Top w4: v1(765,292.37) 765,291.29 IC2.P$67
  4-SIG w3: v1(729.38,605.67) 729.38,582.62 783,529 932,529 987,474 987,405 923,341 856,341 841,356 822,356 800.55,334.55 800.55,314.55 793,307 782,307 767.37,292.37 v1(765,292.37)
FB: C6.2 IC1.6 R1.1 R2.1 | length 130.5
  Top w8: R2.1@941.13,73.28 944.97,73.28 v1(944.97,44)
  Top w10: R2.1@941.13,73.28 C6.2
  Bottom w8: v1(944.97,44) 944.97,43.6 IC1.6
GND: C1.1 C2.1 C3.1 C4.1 C5.2 C7.2 C8.2 C9.2 C10.2 C11.2 C12.2 C13.1 C14.2 C15.1 C16.2 C17.2 C18.2 C19.2 C20.2 C21.2 C22.2 C23.2 C24.2 C25.2 C26.2 C27.2 C28.2 C29.2 C30.2 C31.2 C32.1 C33.1 C34.1 C35.1 C36.1 C37.1 C38.1 C39.1 IC1.2 IC2.P$3 IC2.P$9 IC2.P$12 IC2.P$16 IC2.P$17 IC2.P$18 IC2.P$24 IC2.P$26 IC2.P$28 IC2.P$33 IC2.P$35 IC2.P$38 IC2.P$42 IC2.P$44 IC2.P$46 IC2.P$48 IC2.P$49 IC2.P$53 IC2.P$55 IC2.P$64 IC2.P$66 IC2.P$76 IC2.P$80 IC2.P$89 IC3.2 J1.5 J1.6 J1.8 J1.19 J1.27 R2.2 R4.2 | length 953.3
  Top w4: v1(586.79,217.66) IC2.P$80 ; v1(661.66,343.63) 661.66,343.78 IC2.P$33 ; IC2.P$53 690.38,289.14 v1(690.38,286.6) ; IC2.P$35 736.94,367.88 v1(736.94,368) ; v1@740.34,320.09 IC2.P$46 ; IC2.P$76 752.71,255.7 752.71,260.41 757.24,264.93 v1(757.24,267.63) 755.32,269.55 755.32,273.06 751.07,277.31 IC2.P$66 ; v1(789.58,344.73) 790.57,344.73 IC2.P$38 ; IC2.P$48 v1(813.05,320.09) ; v1(819.31,236.03) 819.79,236.03 827.36,228.46 IC2.P$89
  Top w6: C36.1 487,336.89 v2(487.07,336.82) 506.07,336.82 506.17,336.71 510.41,336.71 C3.1 ; C36.1@496,364.87 500.81,369.68 517.47,369.68 v1(519,371.21) ; v1@519.43,371.21 520.53,372.31 520.53,375.03 529.5,384 C28.2 ; v1(636.66,320.06) 637.88,320.06 648.64,330.82 IC2.P$42 ; IC2.P$12 IC2.P$3 674.29,433.29 687.03,446.03 687.03,447.83 v1(687.8,448.6) ; v1(689,394) 699.88,383.12 IC2.P$24 ; IC2.P$64 700.33,279.64 707.93,287.23 711.23,287.23 722.54,298.54 722.54,300.5 725.48,303.44 IC2.P$55 ; IC2.P$44 IC2.P$55 ; v1(736.94,368) 750.94,382 IC2.P$26 IC2.P$16 IC2.P$17 IC2.P$18 ; v1(740.34,320.02) v1(740.34,320.02) IC2.P$55 ; C1.1 750.87,521.39 742.7,513.22 742.7,501.22 v2(740.4,498.92) 740.5,498.92 749.92,489.5 751.03,489.5 754.03,486.5 C23.2 ; IC2.P$38 IC2.P$38@802.25,357.71 ; IC2.P$28@802.25,380.21 IC2.P$28 IC2.P$18 ; C16.2@826.03,485 826.03,451.05 828,449.08 828,446.92 826.74,445.66 826.74,434.28 IC2.P$9 IC2.P$18
  Bottom w4: C14.2@750.19,279.04 750.19,253 C9.2@753,253 ; C9.2 C9.2@755.21,255.73
  Bottom w6: C33.1 442.13,34.61 451.53,44.01 451.53,44.08 v1(459.69,52.24) 467.6,44.33 467.6,44.01 477,34.61 C32.1 ; C17.2 671.03,303.5 679.8,294.73 682.24,294.73 v1(690.38,286.6) 692.54,286.6 696.94,291 703,291 C22.2 ; v1(789.58,344.73) 802.86,358 C29.2
  Bottom w10: C15.1 824.46,81 IC1.2
  other v1: 843,44 891.96,67.08 705,98 504,108 704,143 520,155 626,187 666.52,187.45 973,265 610.64,267.08 790,293 714,316 973,330 837.37,335.56 611,344 404,381 611.38,394.71 973,416 828,448 904.52,449.45 531,462 404,463 597,472.87 677.59,484.49 809,551 828,551 404,564 966,573 809,606 826.01,606.3 456,616 520,618
  other v2: 595,88 453.9,107.81 430.47,158.76 912.03,171.03 706,185 769,206 915,267 535.14,487.72 531.87,530.43
RESET_N: IC1.5 IC2.P$47 R3.1 | length 475
  Top w4: IC2.P$47 v1@787.39,320.09
  3-SIG w3: v1(787.46,320.09) 805,302.55 805,293 819.12,278.88 821.84,278.88 840,260.71 840,236 827,223 822.55,223 822.25,223.3 811.9,223.3 804.57,215.97 804.57,205.62 814.19,196 868.02,196 872.47,200.44 v1(895.28,200.44)
  Bottom w4: R3.1 896.65,208.35 896.65,203.43 895.28,202.07 v1(895.28,200.44) 895,200.16 895,164.17 909.06,150.11 926.76,150.11 940,136.86 940,88 947,81 IC1.5
SPI_MISO: IC2.P$78 J1.15 | length 277.7
  Top w4: v1@791.52,264.78 IC2.P$78
  3-SIG w3: v1(727.27,454.45) 726.24,453.43 726.24,443.8 726,443.56 726,381.89 724.44,380.33 724.44,362.82 726,361.27 726,354 753.14,326.86 753.14,296.32 ccw(c765,292.37) 753.14,288.42 753.14,286.55 759.64,280.06 762.49,280.06 770.16,272.39 783.84,272.39 v1@791.45,264.78
  Bottom w4: v1(727.27,454.45) 728.41,453.31 728.41,422.4 J1.15
  other v1: 795,263
SPI_MOSI: J1.17
SPI_SCLK: J1.13
SPI_SSEL: J1.11
SW: IC1.3 L3.2 | length 87.2
  Bottom w10: L3.2 808,135.84 825.44,118.4 IC1.3
VAA: C28.1 C29.1 C30.1 C34.2 C35.2 IC2.P$10 IC2.P$19 IC2.P$29 L4.1 | length 760.1
  Top w6: v1(512.4,405.63) 512.77,406 C28.1 ; C28.1@535.03,406 536.62,407.59 IC2.P$10 ; IC2.P$29 IC2.P$19 828.24,407.59 834.65,414 C30.1@890,414 ; C30.1@890.39,414.39 915.27,414.39 C34.2@919.45,418.57 ; C35.2 918.42,370.96 938.78,391.33 938.78,392.97 946.41,400.6 v2(946.41,402.48) ; C34.2 927.61,417.87 v2@940.7,404.78
  4-SIG w8: v1(512.4,405.63) 526.77,420 928.89,420 v2(946.41,402.48)
  Bottom w6: L4.1 944.7,379.83 944.7,400.78 v2(946.41,402.48)
  Bottom w8: v1(836,376) 837,375 C29.1
VAA_PIX: C31.1 C36.2 C38.2 IC2.P$11 L5.1 | length 267.5
  Top w6: L5.1@457,399.13 457,423.54 458.28,424.82 458.28,428.21 476.61,446.54 C38.2 C38.2@483.39,446.54 ; C36.2@485.52,398.07 485.52,444.4 C38.2@483.39,446.54 ; IC2.P$11 606.7,424 535.03,424 534.31,424.72 523.28,424.72 521.16,426.84 510.48,426.84 490.78,446.54 485.52,446.54 C38.2@483.39,446.54
VCC: C13.2 IC1.4 J1.2 J1.10 J1.20 J1.30 J1.36 | length 1155.2
  Bottom w6: J1.36 533.34,578.11 533.34,549.94 536.85,546.43 538.5,546.43 542.41,542.51 591.93,542.51 ; J1.30 590.5,577.48 590.5,551.75 589.08,550.34 589.08,545.37 591.93,542.51 ; 689.34,551.34 666.19,528.19 606.26,528.19 591.93,542.51 ; J1.20 690.19,549.81 693.02,546.98 695,545 784,545 788.61,549.61 J1.10 788.61,607.61 809,628 866,628 870,624 870,602.88 869.86,602.74 869.86,593 867.86,591 J1.2@867.35,590.49
  Bottom w10: J1.2@867.86,591 984,591 992,583 992,182.87 986.53,177.4 986.53,176.92 979.6,170 C13.2 979.13,118.45 IC1.4
VDD: C1.2 C2.2 C5.1 C7.1 C8.1 C9.1 C10.1 C11.1 C12.1 C14.1 C16.1 IC2.P$1 IC2.P$8 IC2.P$22 IC2.P$65 IC2.P$69 IC2.P$72 IC2.P$77 IC2.P$83 IC2.P$85 L1.1 | length 1372.5
  Top w3: IC2.P$72 649.25,254.05 v1(661.93,241.38) 661.93,239.95 673.41,228.46 IC2.P$83
  Top w4: C5.1@621.03,485 618.08,482.05 618.08,439.82 623.11,434.79 IC2.P$1 ; v1@714.75,239.19 IC2.P$85 ; IC2.P$65 v1@734.85,270.27 ; IC2.P$69 837.73,279.64 v1(845.62,287.53)
  Top w6: C5.1@621.03,485 621.03,499.96 648.49,527.43 C2.2 ; L1.1 703.58,526.43 719.43,526.43 740,547 779,547 785.13,540.87 C1.2 789.79,517.34 801.53,517.34 v1(808.75,510.13) ; IC2.P$8 802.25,434.97 804.03,436.75 C16.1@804.03,485 ; C16.1 v1@806.58,504.79
  Top w10: C2.2 658.12,525.37 L1.1
  3-SIG w3: v1(714.75,239.26) 734.85,259.37 734.85,262.85 v1@736,264
  3-SIG w6: v1(559.98,236.75) 561.51,238.28 561.51,242.78 563,244.27 563,298.2 562,299.2 562,317 564,319 564,336.8 563,337.8 563,361.14 v1(555,369.14) 555,371.3 551.78,374.52 551.78,471.37 581.41,501 v1(622,501)
  4-SIG w3: v1(559.98,236.75) 561.48,236.75 567.24,231 596,231 603,224 652,224 v1@664.19,236.19 ; v1(661.93,241.38) 661.93,238.45 v1@664.19,236.19 ; v1(714.75,239.26) 714.75,228.75 708,222 678.38,222 v1@664.19,236.19 ; v1@736,264 756.56,243.44 768.71,243.44 v1(769.47,244.2)
  4-SIG w6: v1(555,369.14) 555,368.37 566.37,357 600.52,357 630.52,387 657.64,387 v1(657.71,386.94) ; v1(559.98,236.75) v1@560.23,237
  Bottom w3: C8.1 647,253.48 651.39,249.1 654.21,249.1 v1(661.93,241.38) 663.01,240.29 663.01,229.99 C7.1
  Bottom w4: C14.1@727,279 730.11,275.89 v1@730.11,269.89 ; C9.1 774.69,254.77 778.61,250.85 779.57,250.85 792.42,238 799,238 810.85,249.85 823.25,249.85 826.4,253 828,253 832,257 832,272.16 826.03,278.13 826.03,281.95 829.94,285.86 833.76,285.86 835.33,287.44 845.52,287.44 v1(845.62,287.53)
  Bottom w6: v1(714.75,239.26) 714.75,238.18 715.85,237.07 715.85,229 718.85,226 C12.1
  other v1: 734,270
VDD_PHY: C3.2 C4.2 C17.1 IC2.P$52 L2.1 | length 234.7
  Top w4: C4.2 484.13,257.59 L2.1 484.25,294.87 C3.2 519.87,293 592.35,293 592.42,292.93 636.93,292.93 v1(637,293) ; v1@636.47,293 IC2.P$52
  Bottom w4: v1(637,293) 644.15,300.12 645.1,300.12 649.03,304.04 C17.1
VDD_REG: C6.1 C15.2 L1.2 L2.2 L3.1 R1.2 | length 1448.5
  Top w10: L2.2 L2.2@449.4,295 ; L1.2 702.53,560.1 695.6,567.03 695.13,567.03 675.15,587 459,587 405,533 405,497.6 420.6,482 420.6,324.28 442.47,302.4 442.47,301.92 L2.2@449.4,295 ; C6.1 905.8,134.92 905.8,104.5 R1.2 867,104 810.69,47.69 v2(713.82,47.69) 519.31,47.69 488,79 442,79 409,112 409,254.13 442.47,287.6 442.47,288.08 L2.2@449.4,295
  Bottom w10: L3.1 741.3,67.24 C15.2
VDDA: C33.2 IC3.1 J1.4 Q1.2 | length 1576.5
  Top w10: v2(400.28,49.74) 401.81,48.21 401.81,42.19 420,24 983,24 999,40 999,286 993,292 993,616.14 987.14,622 857.68,622 851.82,616.14 851.82,615.44 847.82,611.44 v2(847.82,609.27)
  Bottom w4: IC3.1@407.87,76.53 413.75,82.41 IC3.1 453.41,82.41 469.28,98.28 469.28,154.28 481.24,166.24 Q1.2@481.24,189.28
  Bottom w10: v2@407.87,49.74 IC3.1@407.87,76.53 ; J1.4 847.74,578.82 847.74,609.2 v2(847.82,609.27)
VDDIO: C18.1 C19.1 C20.1 C21.1 C22.1 C23.1 C24.1 C25.1 C26.1 C27.1 C37.2 C39.2 IC2.P$2 IC2.P$7 IC2.P$20 IC2.P$59 IC2.P$62 IC2.P$75 IC2.P$82 IC2.P$84 IC2.P$86 IC2.P$88 L6.1 | length 1711.4
  Top w3: v1(583.21,373.52) 590.22,380.54 596.05,380.54 IC2.P$20
  Top w4: v1(638.8,236.5) 639.73,236.5 647.77,228.46 IC2.P$82 ; IC2.P$62 649.36,279.64 v1(661,268) ; v1@693.42,235.6 693.42,235.26 699.88,228.8 IC2.P$84 ; v1(713.37,265.38) 713.91,265.38 725.24,254.05 IC2.P$75 ; v1@740.34,239.19 IC2.P$86 ; IC2.P$88 813.62,217.09 813.62,216.95 817.07,213.5 v1(817.07,210.8)
  Top w6: L6.1 594,156.13 C37.2 ; C37.2@595,156.13 C39.2@650.34,156.13 ; C25.1 644.75,484.28 644.75,473.25 651.83,466.17 651.83,438.1 648.7,434.97 IC2.P$2 ; C39.2 C39.2@650.34,156.13 ; IC2.P$86 736.61,214 714.34,214 IC2.P$84 686.42,215 662.16,215 IC2.P$82 648.7,157.77 C39.2@650.34,156.13 ; C23.1 C23.1@776.07,484.96 ; IC2.P$7 776.66,484.37 C23.1@776.07,484.96 ; v1(787.9,484.92) 787.87,484.96 C23.1@776.07,484.96
  3-SIG w3: v1(583.21,373.52) 582,374.73 582,452.32 584.5,454.82 584.5,478.5 594.33,488.33 609.67,488.33 621.38,476.62 v1@637.64,476.62 ; v1(638.8,236.5) 639.24,236.94 639.24,246.24 v1(661,268) ; v1@693.42,235.6 694.05,236.16 694.05,236.23 705.57,247.75 cw(c714.75,239.26) 706.26,248.44 713.45,255.63 v1(713.37,265.38) v1(713.37,265.38)
  3-SIG w6: v1(582.74,172.17) 571,183.9 571,225 591,245 591,319 583.21,326.79 v1(583.21,373.52) ; v1(787.9,484.92) 813,459.83 813,377 833,357 840,357 856,341 856,315 ; v1(817.07,210.8) 818.29,210.8 824.59,204.5 864.5,204.5 888,228 914,228 946,260 946,291 922,315 856,315 ; v1(819.42,299.68) 834.75,315 856,315
  4-SIG w6: v1(740.34,239.26) 755.97,223.63 807.1,223.63 812.35,218.38 812.35,217.68 817.07,212.96 v1(817.07,210.8)
  Bottom w6: v1(583.21,373.52) 585.37,373.52 587.89,376.04 596.14,376.04 C24.1 ; v1(638.8,236.5) 640.33,234.97 640.33,227.67 C18.1 ; C26.1@643.79,272.73 651.42,272.73 656.15,268 v1(661,268) ; C21.1 693.21,226.21 693.21,235.39 v1@693.42,235.6 ; C22.1@704,272 C22.1 707.5,272 713.37,266.13 v1(713.37,265.38) ; v1(740.34,239.26) 740.34,238.18 741.15,237.37 741.15,228.85 C19.1
  other v1: 695,237 634,476
VDDIO_REG: C32.2 IC1.1 IC3.5 L4.2 L5.2 L6.2 | length 1253.1
  Top w6: v2(456,338) 456.5,338.5 456.5,364.38 L5.2@457,364.87
  Top w10: v2(544,82) 544,84.16 548,88.16 L6.2
  Bottom w6: IC3.5@510.12,82.02 511.25,80.9 C32.2
  Bottom w8: v2(544,82) 601,25 855.46,25 860.15,29.69 860.15,36.77 866.98,43.6 IC1.1 910.6,43.6 917,50 917,127 879,165 879,233.47 888.84,243.3 926.3,243.3 943,260 L4.2
  Bottom w10: v2(456,338) 456,296 520.79,231.21 542.9,231.21 559,215.1 559,142 544,127 v2(544,82) 543.59,82.41 IC3.5
pads on no net: FD1.1 FD2.1 FD3.1 FD4.1 FD5.1 FD6.1 FD7.1 FD8.1 H1.P$1 H1.P$2 IC2.P$4 IC2.P$5 IC2.P$6 IC2.P$14 IC2.P$21 IC2.P$30 IC2.P$31 IC2.P$37 IC2.P$39 IC2.P$40 IC2.P$41 IC2.P$50 IC2.P$51 IC2.P$58 IC2.P$60 IC2.P$61 IC2.P$68 IC2.P$70 IC2.P$71 IC2.P$87 IC3.4 J1.0 J1.MH1 J1.MH2
copper on no net:
  other v2: 440,474 960.06,474 434.24,528.86 961.06,529
  other v3: 100.03,325 1300.03,325

## Polygon pours and split planes (outlines as drawn)
GND on 2-GND "GND_L02_P002" (solid, remove dead copper, pour order 2): 0,0 0,650 1401,650 1401,0
GND on 5-GND "GND_L05_P003" (solid, remove dead copper, pour order 3): 0,0 0,650 1401,650 1401,0
GND on Bottom "GND_L06_P004" (solid, remove dead copper, pour order 4): 0,0 0,650 1401,650 1401,0
GND on Top "GND_L01_P005" (solid, remove dead copper, pour order 5): 0,0 0,650 1401,650 1401,0

## Keep-outs
Keep-Out Layer:
  the board outline again, w0

## Other copper
Top:
  pour cut-out: 875,473 875,189 550,189 550,473
Bottom:
  region: 974,540 910.5,540 910.5,462.44 974,462.44
  rectangle: 415,462.44 489.56,540

## Silkscreen, mask and mechanical layers (free items; w line width, h text height)
Top Overlay:
  circle w10: c100.03,325 r90.14
  circle w10: c1300.03,325 r90.14
Bottom Overlay:
  text "AR0147 R1" at 985.34,415.44 h27.2 r270
  text "openmv.io" at 409.4,410.91 h27.2 r270
Dimension:
  lines w3.94: 1542.26,-125.05 1653.4,-125.05 1868.14,-125.05 2026.68,-125.05 ; 1542.26,-71.85 1653.4,-71.85 1868.14,-71.85 2026.68,-71.85 ; 1542.26,-18.65 1653.4,-18.65 1868.14,-18.65 2026.68,-18.65 ; 1542.26,34.55 1653.4,34.55 1868.14,34.55 2026.68,34.55 ; 1542.26,87.76 1653.4,87.76 1868.14,87.76 2026.68,87.76 ; 1542.26,140.96 1653.4,140.96 1868.14,140.96 2026.68,140.96 ; 1542.26,194.16 1653.4,194.16 1868.14,194.16 2026.68,194.16 ; 1542.26,247.37 1653.4,247.37 1868.14,247.37 2026.68,247.37 ; 1542.26,300.57 1653.4,300.57 1868.14,300.57 2026.68,300.57 ; 1542.26,353.77 1653.4,353.77 1868.14,353.77 2026.68,353.77 ; 1542.26,406.98 1653.4,406.98 1868.14,406.98 2026.68,406.98 ; 1542.26,460.18 1653.4,460.18 1868.14,460.18 2026.68,460.18 ; 1542.26,513.38 1653.4,513.38 1868.14,513.38 2026.68,513.38 ; 1542.26,566.58 1653.4,566.58 1868.14,566.58 2026.68,566.58 ; 1542.26,619.79 2026.68,619.79 ; 1653.4,672.99 1653.4,-178.26 ; 1868.14,672.99 1868.14,-178.26 ; 1653.4,-178.26 1542.26,-178.26 1542.26,672.99 2026.68,672.99 2026.68,-178.26 1868.14,-178.26 ; 1653.4,-178.26 1868.14,-178.26
  text "OpenMV HD-HDR-AR0147" at 697.58,707.2 h80
  text "Layer" at 1568.86,633.09 h26.6
  text "Name" at 1680,633.09 h26.6
  text "Thickness" at 1894.75,633.09 h26.6
  text "Top Overlay" at 1680,579.88 h26.6
  text "Top Solder" at 1680,526.68 h26.6
  text "0.010mm" at 1894.75,526.68 h26.6
  text "1" at 1568.86,473.48 h26.6
  text "Top" at 1680,473.48 h26.6
  text "0.035mm" at 1894.75,473.48 h26.6
  text "Dielectric 2" at 1680,420.28 h26.6
  text "0.127mm" at 1894.75,420.28 h26.6
  text "2" at 1568.84,367.07 h26.6
  text "2-GND" at 1679.97,367.07 h26.6
  text "0.035mm" at 1894.75,367.07 h26.6
  text "Dielectric 3" at 1680,313.87 h26.6
  text "0.254mm" at 1894.75,313.87 h26.6
  text "3" at 1568.86,260.67 h26.6
  text "3-SIG" at 1680,260.67 h26.6
  text "0.035mm" at 1894.75,260.67 h26.6
  text "Dielectric 1" at 1680,207.46 h26.6
  text "0.200mm" at 1894.75,207.46 h26.6
  text "4" at 1568.86,154.26 h26.6
  text "4-SIG" at 1680,154.26 h26.6
  text "0.035mm" at 1894.75,154.26 h26.6
  text "Dielectric 4" at 1680,101.06 h26.6
  text "0.254mm" at 1894.75,101.06 h26.6
  text "5" at 1568.86,47.86 h26.6
  text "5-GND" at 1680,47.86 h26.6
  text "0.035mm" at 1894.75,47.86 h26.6
  text "TG-170 or equivalent substrate  / Er = 4.3-4.5 @ 1MHz / +/- 10% /  / double side solder mask red / double side silkscreen white /  / 3 mil min trace width and / 3 mil min isolation /  / RoHS required" at 2311.89,9.4 h30
  text "Dielectric 5" at 1680,-5.35 h26.6
  text "0.127mm" at 1894.75,-5.35 h26.6
  text "6" at 1568.86,-58.55 h26.6
  text "Bottom" at 1680,-58.55 h26.6
  text "0.035mm" at 1894.75,-58.55 h26.6
  text "Bottom Solder" at 1680,-111.75 h26.6
  text "0.010mm" at 1894.75,-111.75 h26.6
  text "Bottom Overlay" at 1680,-164.96 h26.6